# Altium PCB PCB1.PcbDoc (part 1 of 2)
Units mm, origin at the board's own origin, x right, y up, seen from the top; angles counter-clockwise.
Board outline 135 x 78 mm, 2 copper layers (Top Layer, Bottom Layer); 157 components, 80 nets, 337 pads, 19 vias.
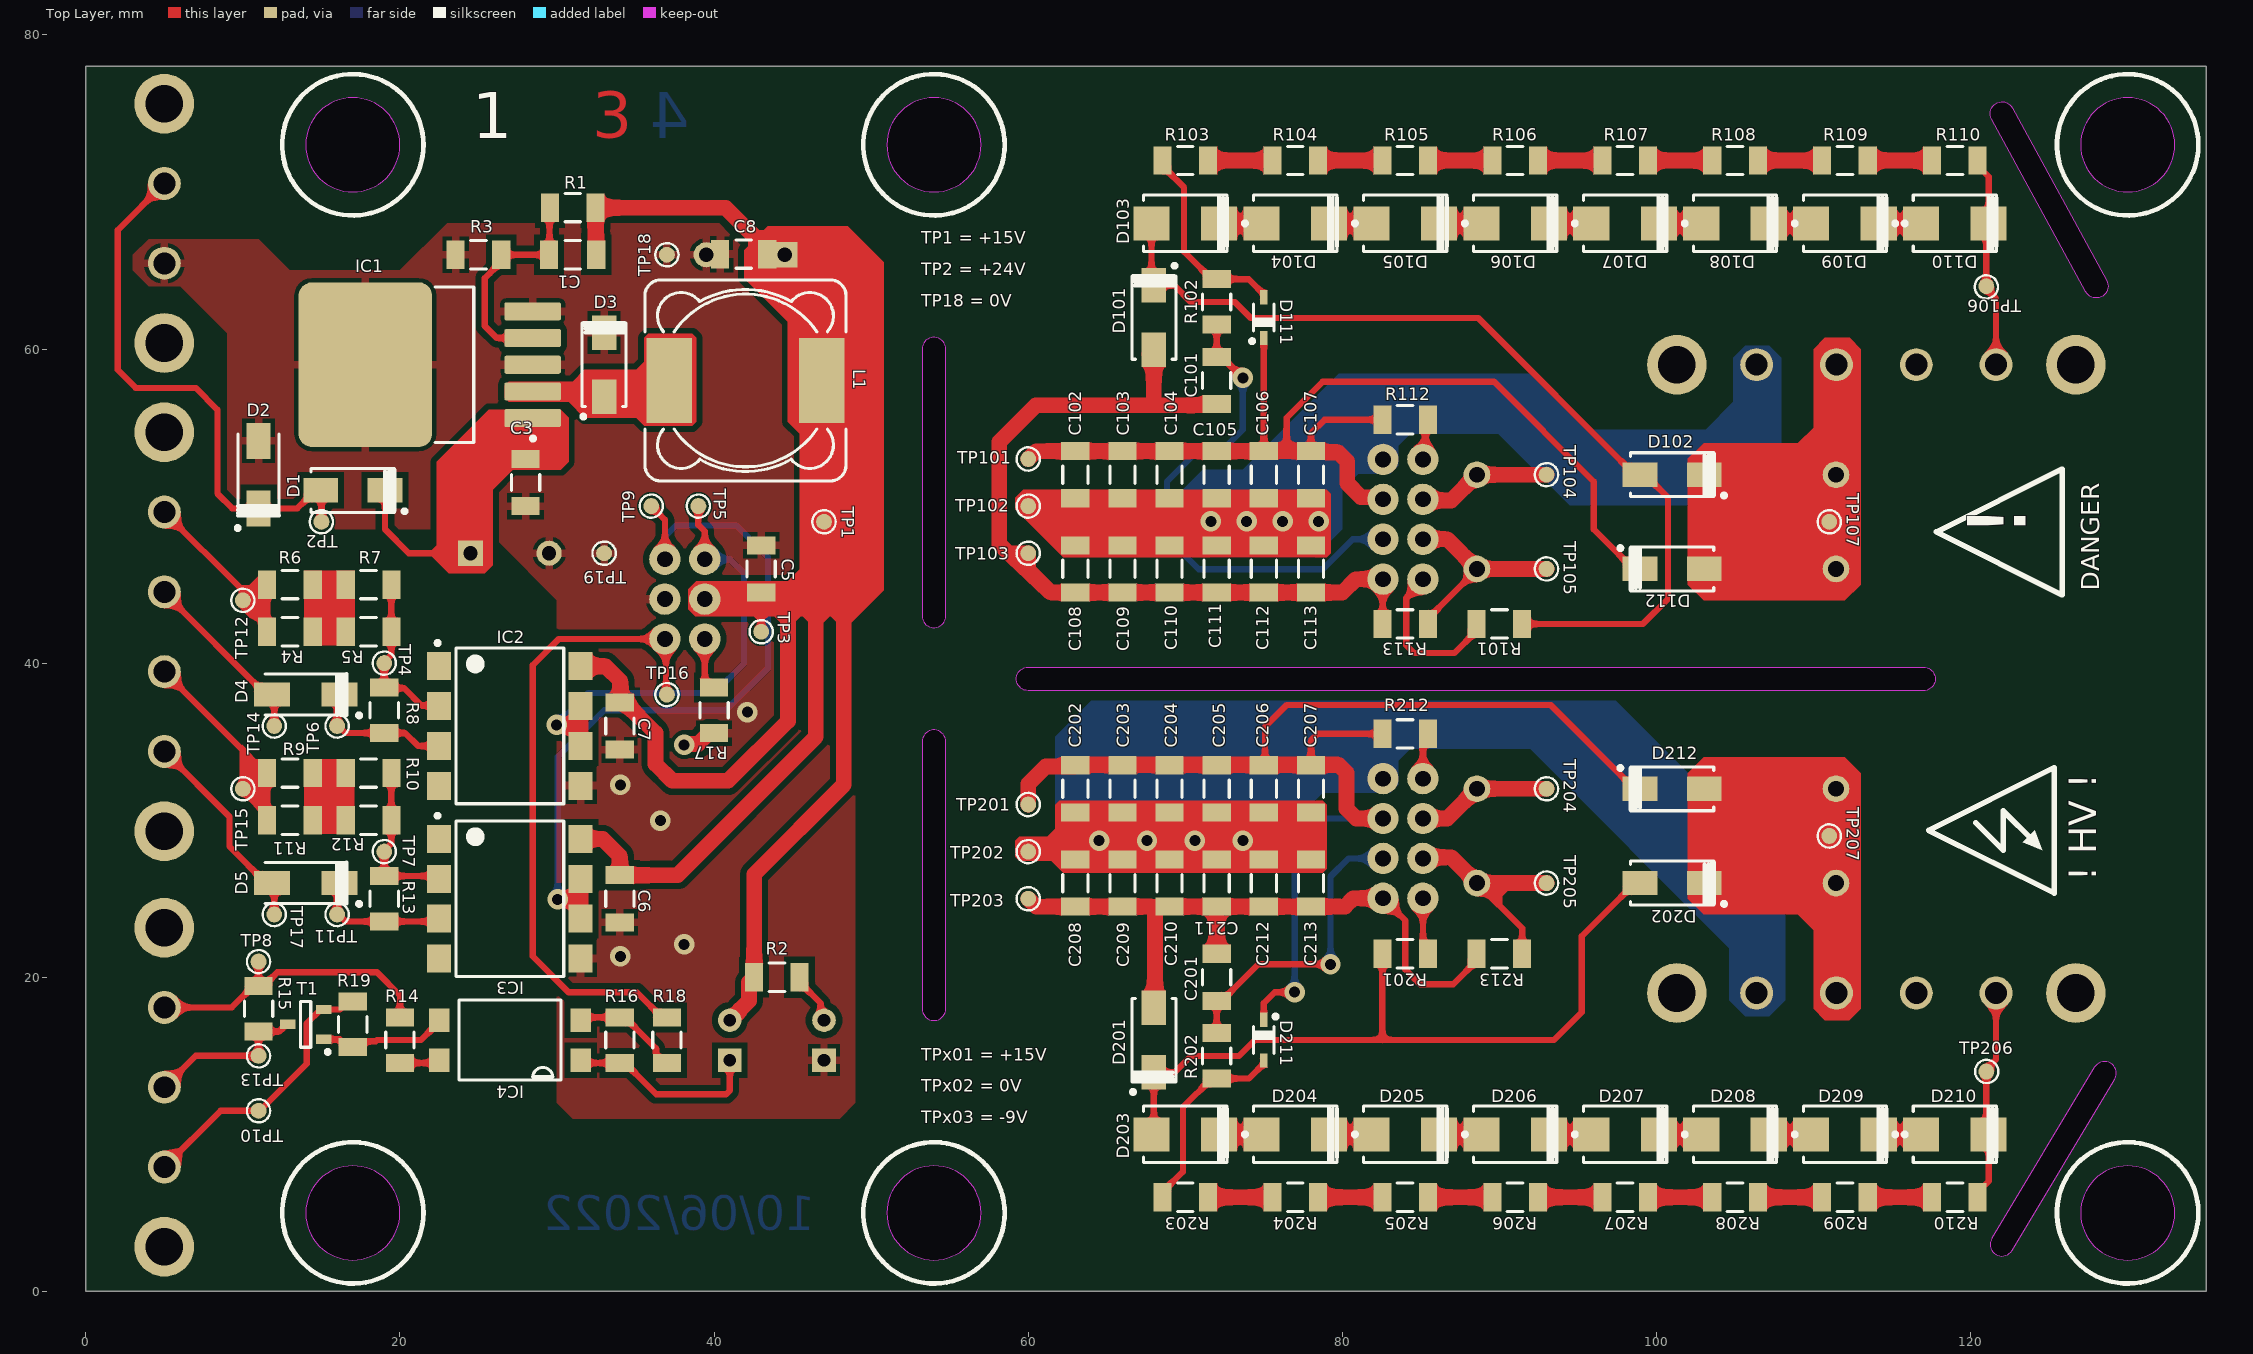
[diagram p0: Top Layer view]
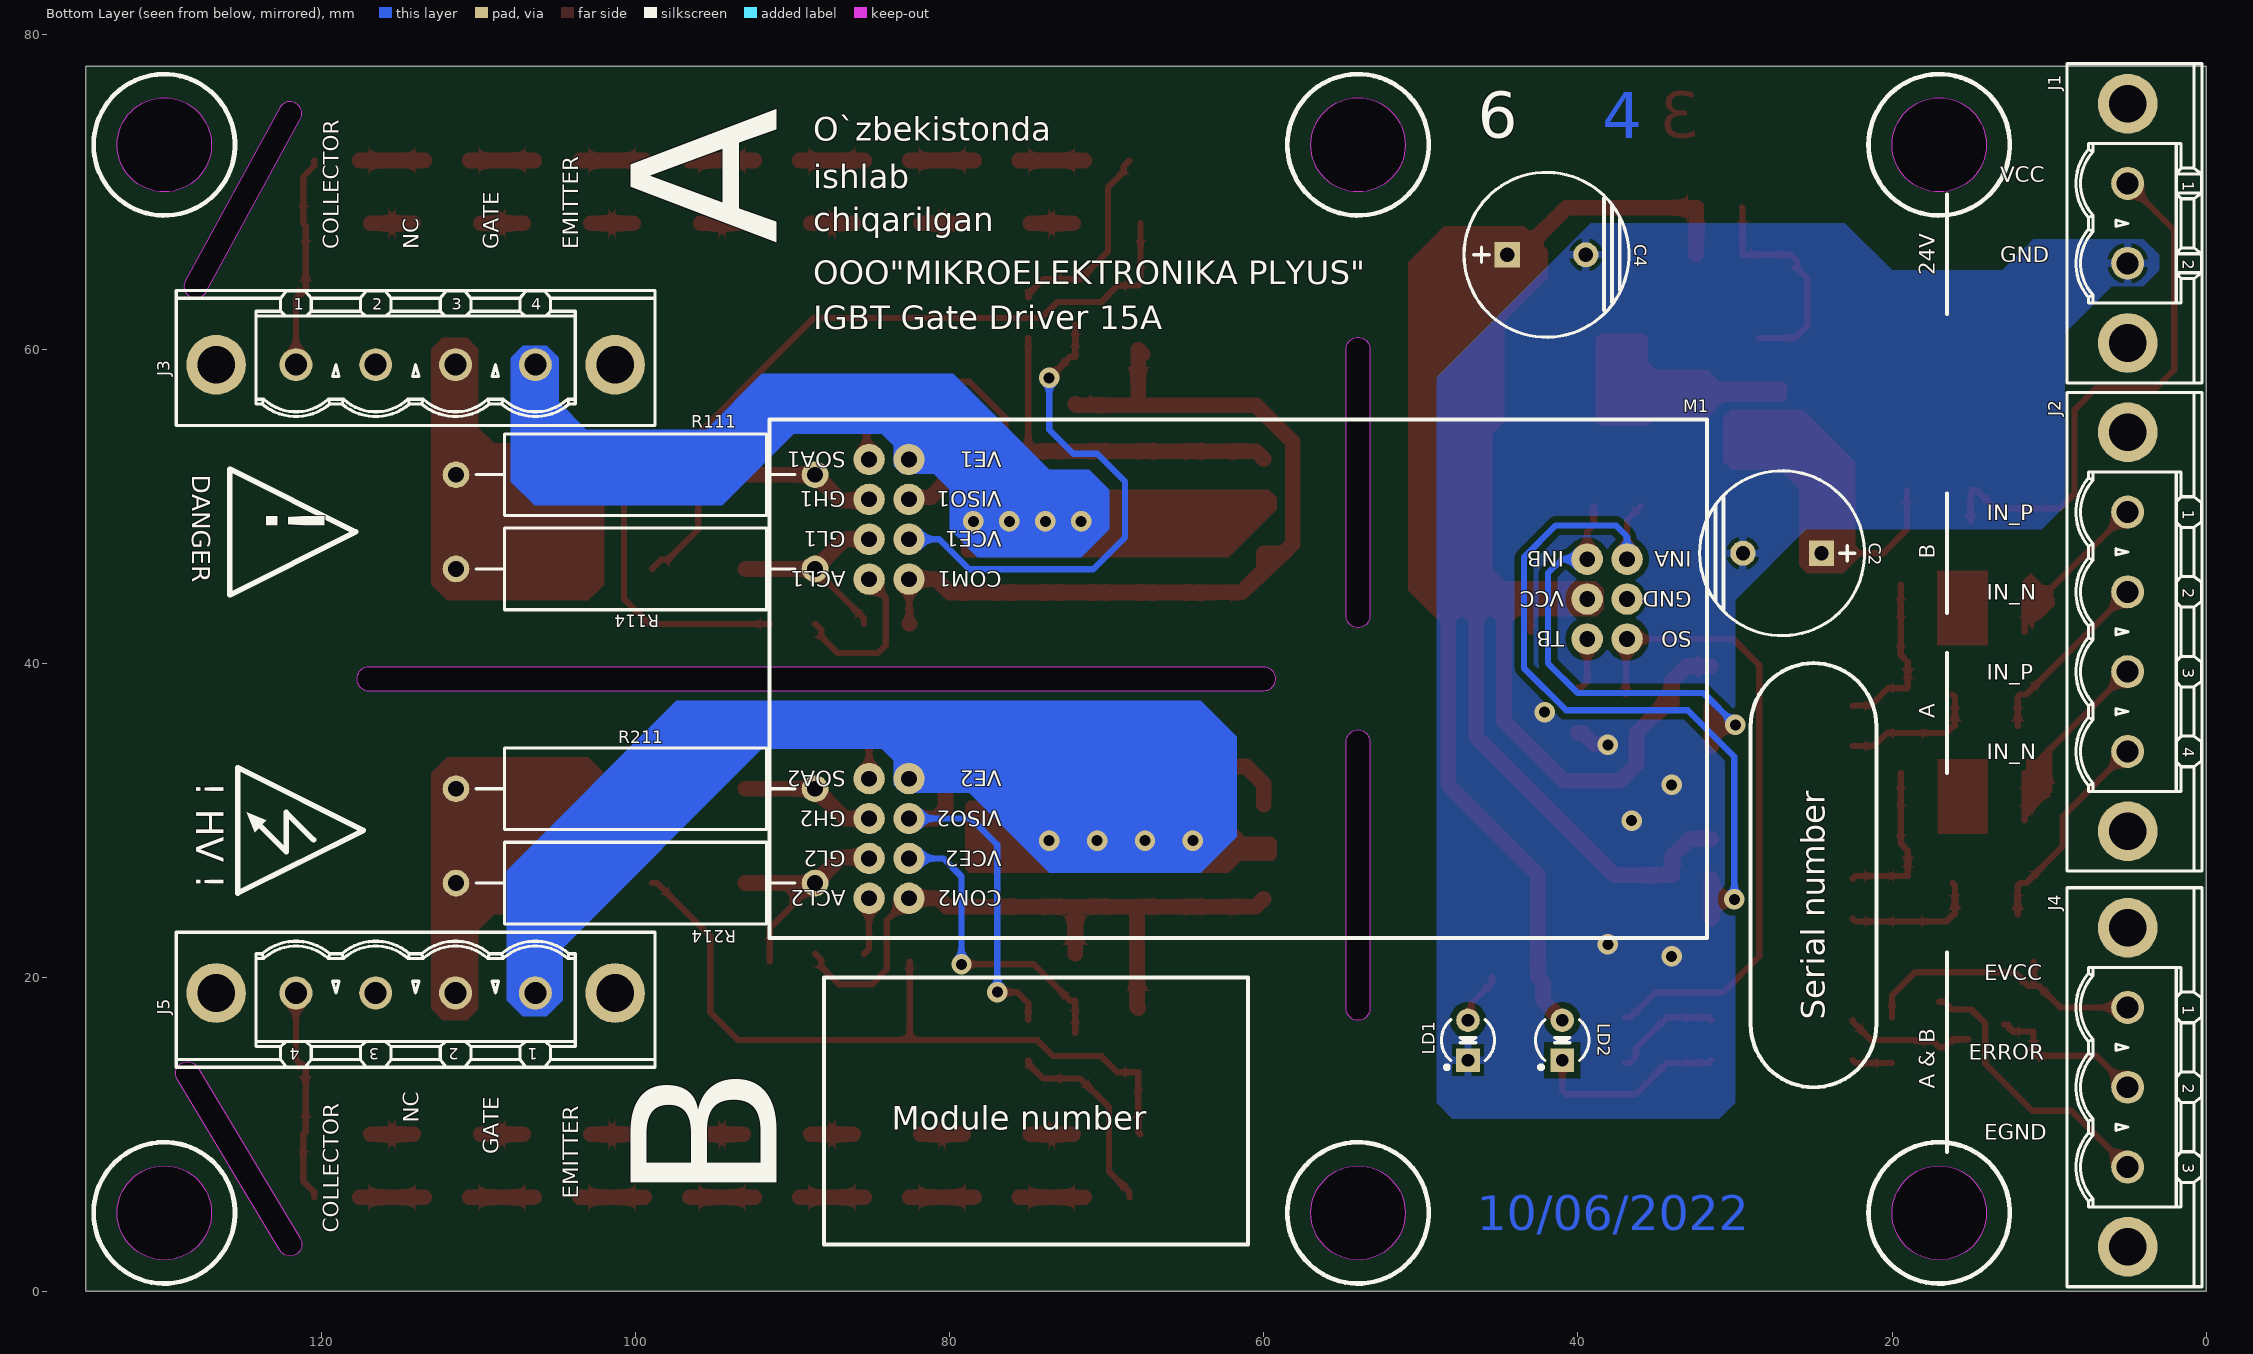
[diagram p1: Bottom Layer view, seen from below]
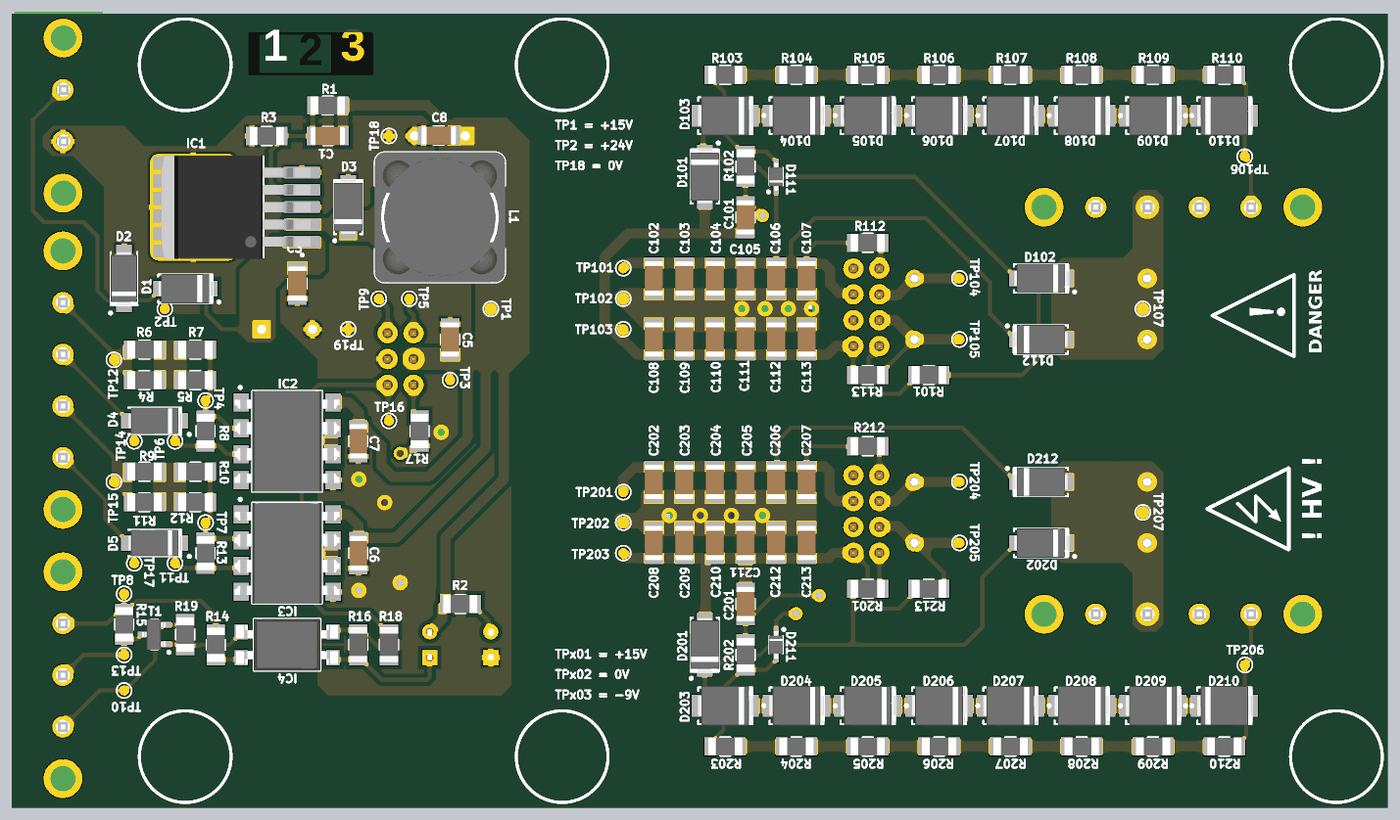
[diagram p3: 3D render of the assembled board from above, using the file's embedded part models]
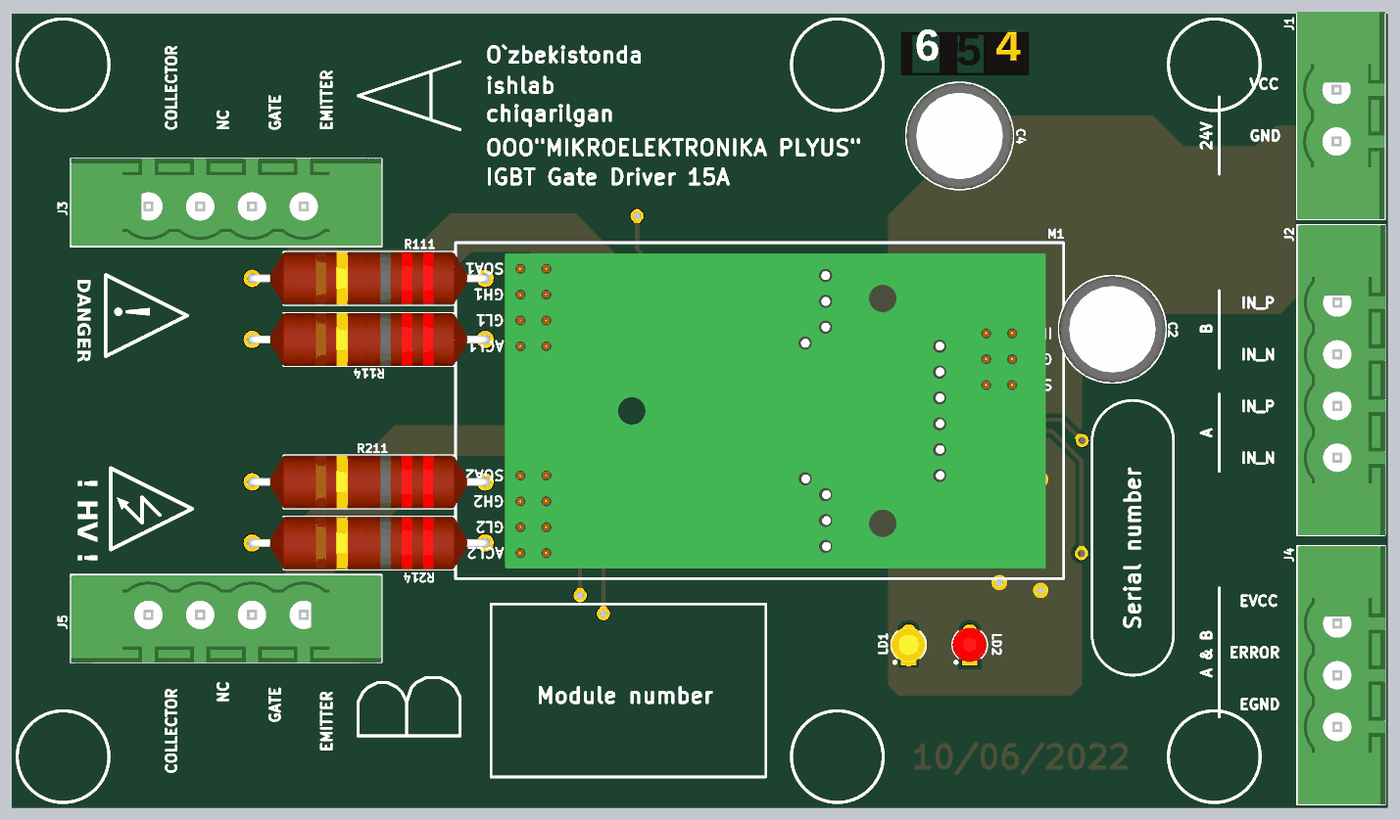
[diagram p4: 3D render of the assembled board from below, using the file's embedded part models]

## Layer stack, top to bottom
Top Solder: solder mask 0.0102, Solder Resist, Dk 3.5
Top Layer: signal copper 0.0356
Dielectric 1: dielectric 0.32, FR-4, Dk 4.8
Bottom Layer: signal copper 0.0356
Bottom Solder: solder mask 0.0102, Solder Resist, Dk 3.5

## Board outline
0,0 0,78 135,78 135,0
cut-out: 121.357,3.386 ccw(c122,3) 122.643,2.614 129.173,13.496 ccw(c128.529,13.882) 129.28,13.882 ccw(c128.529,13.882) 127.886,14.268
cut-out: 127.341,63.641 121.341,74.641 cw(c122,75) 122.659,75.359 128.659,64.359 cw(c128,64) 128.75,64 cw(c128,64)
cut-out: 51,73 ccw(c54,73) 54,70 ccw(c54,73) 57,73 ccw(c54,73) 54,76 ccw(c54,73)
cut-out: 51,5 ccw(c54,5) 54,2 ccw(c54,5) 57,5 ccw(c54,5) 54,8 ccw(c54,5)
cut-out: 53.25,43 ccw(c54,43) 54.75,43 54.75,60 ccw(c54,60) 53.25,60
cut-out: 53.25,18 ccw(c54,18) 54.75,18 54.75,35 ccw(c54,35) 53.25,35
cut-out: 60,38.25 cw(c60,39) 60,39.75 117,39.75 cw(c117,39) 117.75,39 cw(c117,39) 117,38.25
cut-out: 127,5 ccw(c130,5) 130,2 ccw(c130,5) 133,5 ccw(c130,5) 130,8 ccw(c130,5)
cut-out: 127,73 ccw(c130,73) 130,70 ccw(c130,73) 133,73 ccw(c130,73) 130,76 ccw(c130,73)
cut-out: 14,73 ccw(c17,73) 17,70 ccw(c17,73) 20,73 ccw(c17,73) 17,76 ccw(c17,73)
cut-out: 14,5 ccw(c17,5) 17,2 ccw(c17,5) 20,5 ccw(c17,5) 17,8 ccw(c17,5)

## Design rules (kind name [scope] priority, off if disabled: settings)
BoardOutlineClearance [All] p1: gap=0.2 ignorepadtopadclearanceinfootprint=FALSE except(0.4: Arc-SplitBarrior Arc-SplitContinuation Track-SplitBarrior Track-SplitContinuation SMDPad-SplitBarrior SMDPad-SplitContinuation THPad-SplitBarrior THPad-SplitContinuation Via-SplitBarrior Via-SplitContinuation Fill-SplitBarrior Fill-SplitContinuation Poly-SplitBarrior Poly-SplitContinuation Region-SplitBarrior Region-SplitContinuation Text-SplitBarrior Text-SplitContinuation)
Clearance "Clearance Bottom Layer" [OnLayer('Bottom Layer')] p1: gap=0.4 ignorepadtopadclearanceinfootprint=TRUE except(0.203: Arc-Arc Arc-Track Arc-SMDPad Arc-THPad Arc-Via Arc-Hole Track-Track Track-SMDPad Track-THPad Track-Via Track-Hole SMDPad-SMDPad SMDPad-THPad SMDPad-Via SMDPad-Hole THPad-THPad THPad-Via THPad-Hole Via-Via Via-Hole Fill-Hole Poly-Hole Region-Hole Text-Hole; 0.254: Arc-Text Track-Text SMDPad-Text THPad-Text Via-Text Fill-Text Poly-Text Region-Text Text-Text)
Clearance "Clearance Top Layer" [OnLayer('Top Layer')] p2: gap=0.4 ignorepadtopadclearanceinfootprint=TRUE except(0.203: Arc-Arc Arc-Track Arc-SMDPad Arc-THPad Arc-Via Arc-Hole Track-Track Track-SMDPad Track-THPad Track-Via Track-Hole SMDPad-SMDPad SMDPad-THPad SMDPad-Via SMDPad-Hole THPad-THPad THPad-Via THPad-Hole Via-Via Via-Hole Fill-Hole Poly-Hole Region-Hole Text-Hole; 0.254: Arc-Text Track-Text SMDPad-Text THPad-Text Via-Text Fill-Text Poly-Text Region-Text Text-Text)
Clearance [All] p3: gap=0.2 ignorepadtopadclearanceinfootprint=FALSE except(0.089: Arc-Arc Arc-Track Arc-SMDPad Track-Track Track-SMDPad SMDPad-SMDPad; 0.127: Arc-Via Track-Via SMDPad-Via THPad-Via Via-Via; 0.254: Arc-Text Track-Text SMDPad-Text THPad-Text Via-Text Fill-Text Poly-Text Region-Text Text-Text)
HoleSize [All] p1: absolutevalues=TRUE maxlimit=6.3 minlimit=0.2 maxpercent=80.000 minpercent=20.000
MinimumAnnularRing [All] p1: minimumring=0.076
MinimumSolderMaskSliver [All] p1: minsoldermaskwidth=0.1
PolygonConnect PolygonConnect_1 [All] p1: thpad.connectstyle=Relief thpad.reliefconductorwidth=0.508 thpad.reliefentries=4 thpad.polygonreliefangle="90 Angle" thpad.airgapwidth=0.254 smdpad.connectstyle=Relief smdpad.reliefconductorwidth=0.508 smdpad.reliefentries=4 smdpad.polygonreliefangle="90 Angle" smdpad.airgapwidth=0.254 via.connectstyle=Direct via.reliefconductorwidth=0.508 via.reliefentries=4 via.polygonreliefangle="90 Angle" via.airgapwidth=0.254
RoutingCorners [All] p1: cornerstyle=Round minsetback=2.54 maxsetback=2.54
RoutingVias [All] p1: holewidth=0.5 width=1 viastyle="Through Hole" minholewidth=0.2 minwidth=0.45 maxholewidth=1 maxwidth=2
SilkToSilkClearance [All] p1: silktosilkclearance=0.1
SilkToSolderMaskClearance [IsPad] p1: minsilkscreentomaskgap=0.1 clearancetoexposedcopper=TRUE
SolderMaskExpansion [All] p1: expansion=0.102 istentingtop=FALSE
Width [All] p1: maxlimit=2.54 minlimit=0.089 preferedwidth=0.381
25 further rules are at their usual default settings.

## Components (designator, comment, footprint, x,y, rotation, side; value= is the part's Value field where it differs from the comment)
C1 "100nF" CAPC3216X140N 31,66 r180 top
C2 "220uF" CAPPR500-1050X1750 27,47 r0 bottom
C3 "100nF" CAPC3216X140N 28,51.5 r270 top
C4 "220uF" CAPPR500-1050X1750 42,66 r180 bottom
C5 "100nF" CAPC3216X140N 43,46 r90 top
C6 "100nF" CAPC3216X140N 34,25 r270 top
C7 "100nF" CAPC3216X140N 34,36 r270 top
C8 "100nF" CAPC3216X140N 41.886,66.04 r180 top
C101 "27pF" CAPC3216X140N 72,58 r270 top
C102 "10uF" CAPC3216X180N 63,52 r90 top
C103 "10uF" CAPC3216X180N 66,52 r90 top
C104 "10uF" CAPC3216X180N 69,52 r90 top
C105 "10uF" CAPC3216X180N 72,52 r90 top
C106 "10uF" CAPC3216X180N 75,52 r90 top
C107 "10uF" CAPC3216X180N 78,52 r90 top
C108 "10uF" CAPC3216X180N 63,46 r90 top
C109 "10uF" CAPC3216X180N 66,46 r90 top
C110 "10uF" CAPC3216X180N 69,46 r90 top
C111 "10uF" CAPC3216X180N 72,46 r90 top
C112 "10uF" CAPC3216X180N 75,46 r90 top
C113 "10uF" CAPC3216X180N 78,46 r90 top
C201 "27pF" CAPC3216X140N 72,20 r90 top
C202 "10uF" CAPC3216X180N 63,32 r90 top
C203 "10uF" CAPC3216X180N 66,32 r90 top
C204 "10uF" CAPC3216X180N 69,32 r90 top
C205 "10uF" CAPC3216X180N 72,32 r90 top
C206 "10uF" CAPC3216X180N 75,32 r90 top
C207 "10uF" CAPC3216X180N 78,32 r90 top
C208 "10uF" CAPC3216X180N 63,26 r90 top
C209 "10uF" CAPC3216X180N 66,26 r90 top
C210 "10uF" CAPC3216X180N 69,26 r90 top
C211 "10uF" CAPC3216X180N 72,26 r90 top
C212 "10uF" CAPC3216X180N 75,26 r90 top
C213 "10uF" CAPC3216X180N 78,26 r90 top
D1 "SS16" DIOM5127X229N 17,51 r180 top
D2 "SMAJ24A" DIOM5226X262N 11,52 r90 top
D3 "SS16" DIOM5127X229N 33,59 r90 top
D4 "1SMA5918BT3G" DIOM5226X220N 14,38 r180 top
D5 "1SMA5918BT3G" DIOM5226X220N 14,26 r180 top
D101 "SS16" DIOM5127X229N 68,62 r270 top
D102 "SS16" DIOM5127X229N 101,52 r180 top
D103 "SMBJ150A" DIOM5336X265N 70,68 r180 top
D104 "SMBJ150A" DIOM5336X265N 77,68 r180 top
D105 "SMBJ150A" DIOM5336X265N 84,68 r180 top
D106 "SMBJ150A" DIOM5336X265N 91,68 r180 top
D107 "SMBJ150A" DIOM5336X265N 98,68 r180 top
D108 "SMBJ150A" DIOM5336X265N 105,68 r180 top
D109 "SMBJ150A" DIOM5336X265N 112,68 r180 top
D110 "SMBJ150CA" DIOM5336X265N 119,68 r0 top
D111 "BAS416" SOD2512X110N 75,62 r90 top
D112 "SS16" DIOM5127X229N 101,46 r0 top
D201 "SS16" DIOM5127X229N 68,16 r90 top
D202 "SS16" DIOM5127X229N 101,26 r180 top
D203 "SMBJ150A" DIOM5336X265N 70,10 r180 top
D204 "SMBJ150A" DIOM5336X265N 77,10 r180 top
D205 "SMBJ150A" DIOM5336X265N 84,10 r180 top
D206 "SMBJ150A" DIOM5336X265N 91,10 r180 top
D207 "SMBJ150A" DIOM5336X265N 98,10 r180 top
D208 "SMBJ150A" DIOM5336X265N 105,10 r180 top
D209 "SMBJ150A" DIOM5336X265N 112,10 r180 top
D210 "SMBJ150CA" DIOM5336X265N 119,10 r0 top
D211 "BAS416" SOD2512X110N 75,16 r270 top
D212 "SS16" DIOM5127X229N 101,32 r0 top
IC1 "LM2596R-ADJ" TO-263-5 22,59 r180 top
IC2 "FOD3182SDV" "FAIRCHILD_8LD MDIP (OPTION S)" 27,36 r0 top
IC3 "FOD3182SDV" "FAIRCHILD_8LD MDIP (OPTION S)" 27,25 r0 top
IC4 "PC817" FAIRCHILD_FOD817DSD 27,16 r180 top
J1 "" PHOENIX_1777073 5,68 r270 bottom
J2 "" PHOENIX_1777099 5,42 r270 bottom
J3 "" PHOENIX_1777099 114,59 r180 bottom
J4 "" PHOENIX_1777086 5,13 r270 bottom
J5 "" PHOENIX_1777099 114,19 r0 bottom
L1 "33uH" IND_BOURNS_PM127SH 42,58 r0 top
LD1 "Yellow" LED_3MM_YELLOW_1C-2A 47,16 r90 bottom
LD2 "Red" LED_3MM_RED_1C-2A 41,16 r90 bottom
M1 "2SC0115T" 2sc0115t 61,39 r0 bottom locked
R1 "20k" RESC3216X65N 31,69 r0 top
R2 "2k" RESC3216X65N 44,20 r0 top
R3 "1k8" RESC3216X65N 25,66 r0 top
R4 "1k" RESC3216X65N 13,42 r0 top
R5 "1k" RESC3216X65N 18,42 r0 top
R6 "1k" RESC3216X65N 13,45 r0 top
R7 "1k" RESC3216X65N 18,45 r0 top
R8 "4k7" RESC3216X65N 19,37 r90 top
R9 "1k" RESC3216X65N 13,33 r0 top
R10 "1k" RESC3216X65N 18,33 r0 top
R11 "1k" RESC3216X65N 13,30 r0 top
R12 "1k" RESC3216X65N 18,30 r0 top
R13 "4k7" RESC3216X65N 19,25 r90 top
R14 "4k7" RESC3216X65N 20,16 r90 top
R15 "4k7" RESC3216X65N 11,18 r90 top
R16 "2k" RESC3216X70N 34,16 r270 top
R17 "150k" RESC3216X65N 40,37 r90 top
R18 "2k" RESC3216X70N 37,16 r270 top
R19 "100k" RESC3216X65N 17,17 r270 top
R101 "20" RESC3216X65N 90,42.5 r0 top
R102 "120k" RESC3216X65N 72,63 r90 top
R103 "150k" RESC3216X65N 70,72 r0 top
R104 "150k" RESC3216X65N 77,72 r0 top
R105 "150k" RESC3216X65N 84,72 r0 top
R106 "150k" RESC3216X65N 91,72 r0 top
R107 "150k" RESC3216X65N 98,72 r0 top
R108 "150k" RESC3216X65N 105,72 r0 top
R109 "150k" RESC3216X65N 112,72 r0 top
R110 "150k" RESC3216X65N 119,72 r0 top
R111 "5R6" RES2286-1670X520 100,52 r0 bottom
R112 "10k" RESC3216X65N 84,55.5 r180 top
R113 "6k8" RESC3216X65N 84,42.5 r180 top
R114 "5R6" RES2286-1670X520 100,46 r0 bottom
R201 "20" RESC3216X65N 84,21.5 r180 top
R202 "120k" RESC3216X65N 72,15 r270 top
R203 "150k" RESC3216X65N 70,6 r0 top
R204 "150k" RESC3216X65N 77,6 r0 top
R205 "150k" RESC3216X65N 84,6 r0 top
R206 "150k" RESC3216X65N 91,6 r0 top
R207 "150k" RESC3216X65N 98,6 r0 top
R208 "150k" RESC3216X65N 105,6 r0 top
R209 "150k" RESC3216X65N 112,6 r0 top
R210 "150k" RESC3216X65N 119,6 r0 top
R211 "5R6" RES2286-1670X520 100,32 r0 bottom
R212 "10k" RESC3216X65N 84,35.5 r180 top
R213 "6k8" RESC3216X65N 90,21.5 r180 top
R214 "5R6" RES2286-1670X520 100,26 r0 bottom
T1 "BC817" SOT95P230X110-3N 14,17 r180 top
TP1 "Test_point" TP_C40#1 47,49 r0 top
TP2 "Test_point" TP_C40#1 15,49 r90 top
TP3 "Test_point" TP_C40#1 43,42 r90 top
TP4 "Test_point" TP_C40#1 19,40 r90 top
TP5 "Test_point" TP_C40#1 39,50 r90 top
TP6 "Test_point" TP_C40#1 16,36 r90 top
TP7 "Test_point" TP_C40#1 19,28 r90 top
TP8 "Test_point" TP_C40#1 11,21 r270 top
TP9 "Test_point" TP_C40#1 36,50 r90 top
TP10 "Test_point" TP_C40#1 11,11.5 r270 top
TP11 "Test_point" TP_C40#1 16,24 r90 top
TP12 "Test_point" TP_C40#1 10,44 r90 top
TP13 "Test_point" TP_C40#1 11,15 r270 top
TP14 "Test_point" TP_C40#1 12,36 r90 top
TP15 "Test_point" TP_C40#1 10,32 r90 top
TP16 "Test_point" TP_C40#1 37,38 r270 top
TP17 "Test_point" TP_C40#1 12,24 r90 top
TP18 "Test_point" TP_C40#1 37,66 r180 top
TP19 "Test_point" TP_C40#1 33,47 r90 top
TP101 "Test_point" TP_C40#1 60,53 r180 top
TP102 "Test_point" TP_C40#1 60,50 r180 top
TP103 "Test_point" TP_C40#1 60,47 r180 top
TP104 "Test_point" TP_C40#1 93,52 r90 top
TP105 "Test_point" TP_C40#1 93,46 r90 top
TP106 "Test_point" TP_C40#2 121.285,64.135 r90 top
TP107 "Test_point" TP_C40#1 111,49 r90 top
TP201 "Test_point" TP_C40#1 60,31 r180 top
TP202 "Test_point" TP_C40#1 60,28 r180 top
TP203 "Test_point" TP_C40#1 60,25 r180 top
TP204 "Test_point" TP_C40#1 93,32 r90 top
TP205 "Test_point" TP_C40#1 93,26 r90 top
TP206 "Test_point" TP_C40#3 121.285,13.97 r180 top
TP207 "Test_point" TP_C40#1 111,29 r90 top

## Footprints (in the part's own frame and the unit in brackets; to place one, negate y for a bottom-side part, rotate by r counter-clockwise, add the part's x,y. Pads: shape width x height; smd on the part's side, far side on the other; paste and mask are expansions set on the pad)
2sc0115t [mm]
  round 2 hole 1: 1(-21.59,-2.54) 2(-24.13,-2.54) 3(-21.59,-5.08) 4(-24.13,-5.08) 5(-21.59,-7.62) 6(-24.13,-7.62) 7(21.59,-13.97) 8(24.13,-13.97) 9(21.59,-11.43) 10(24.13,-11.43) 11(21.59,-8.89) 12(24.13,-8.89) 13(21.59,-6.35) 14(24.13,-6.35) 15(21.59,6.35) 16(24.13,6.35) 17(21.59,8.89) 18(24.13,8.89) 19(21.59,11.43) 20(24.13,11.43) 21(21.59,13.97) 22(24.13,13.97)
  silkscreen extent -29.21,-16.51 30.48,16.51, body extent -27.46,-15.49 25.63,15.52, height 14.38
CAPC3216X140N [mm] "Chip Capacitor, Body 3.2x1.6mm, IPC Medium Density"
  rect 1.15x1.8 smd: 1(-1.5,0) 2(1.5,0)
  silkscreen extent -0.5,-0.9 0.5,0.9, body extent -1.7,-0.9 1.7,0.9, height 1.4
CAPC3216X180N [mm] "Chip Capacitor, Body 3.2x1.6mm, IPC Medium Density"
  rect 1.15x1.8 smd: 1(-1.5,0) 2(1.5,0)
  silkscreen extent -0.55,-0.8 0.55,0.8, body extent -1.7,-0.9 1.7,0.9, height 1.8
CAPPR500-1050X1750 [mm] "Capacitor, Radial, Pin spacing 5.0mm - Body Diameter 10.5mm X Body Height 17.5mm"
  rect 1.6x1.6 hole 0.9: 1(-2.5,0)
  round 1.6 hole 0.9: 2(2.5,0)
  silkscreen extent -5.25,-5.25 5.25,5.25, body extent -5.25,-5.25 5.25,5.25, height 17.5
DIOM5127X229N [mm] "DO-214-AC/SMA Diode, Molded Body; 5.10mm L X 2.67mm W X 2.29mm H, IPC Medium Density"
  rect 2.2x1.55 smd: 1(-2.05,0) 2(2.05,0)
  silkscreen extent -3.43,-1.4 2.65,1.45, body extent -2.67,-1.45 2.68,1.45, height 2.29
DIOM5226X220N [mm] "DO-214-AC/SMA Diode, Molded Body; 5.21mm L X 2.60mm W X 2.20mm H, IPC Medium Density"
  rect 2.3x1.55 smd: 1(-2.15,0) 2(2.15,0)
  silkscreen extent -3.53,-1.3 2.6,1.45, body extent -2.6,-1.3 2.6,1.3, height 2.2
DIOM5226X262N [mm] "DO-214-AC/SMA Diode, Molded Body; 5.21mm L X 2.605mm W X 2.62mm H, IPC Medium Density"
  rect 2.3x1.55 smd: 1(-2.15,0) 2(2.15,0)
  silkscreen extent -3.52,-1.3 2.6,1.45, body extent -2.6,-1.3 2.6,1.31, height 2.62
DIOM5336X265N [mm] "DO-214-AA/SMB Diode, Molded Body; 5.34mm L X 3.625mm W X 2.65mm H, IPC Medium Density"
  rect 2.3x2.15 smd: 1(-2.15,0) 2(2.15,0)
  silkscreen extent -3.93,-1.8 2.65,1.8, body extent -2.7,-1.95 2.7,1.95, height 2.4
"FAIRCHILD_8LD MDIP (OPTION S)" [mm] "DIP Gull Wing Surface Mount, 8-Leads, Body 9.65x6.6mm, Pitch 2.54mm, FAIRCHILD 8LD MDIP"
  rect 1.52x1.78 smd: 1(-4.505,3.81) 2(-4.505,1.27) 3(-4.505,-1.27) 4(-4.505,-3.81) 5(4.505,-3.81) 6(4.505,-1.27) 7(4.505,1.27) 8(4.505,3.81)
  silkscreen extent -4.72,-4.96 3.43,5.41, body extent -5.15,-4.95 5.15,4.96, height 5.08
FAIRCHILD_FOD817DSD [mm] "SOIC, 2.54mm Pitch, 4 Pin, Body 6.5mm W X 4.6mm L X 4.6mm H"
  rect 1.3x1.5 smd: 1(-4.5,1.27) 2(-4.5,-1.27) 3(4.5,-1.27) 4(4.5,1.27)
  silkscreen extent -3.25,-2.55 3.25,2.55, body extent -5.01,-2.55 5.02,2.55, height 4.06
IND_BOURNS_PM127SH [mm] "SMD Inductor Body Width 12.5mm Body Lenght 12.5mm Height 8mm"
  rect 2.9x5.4 smd: 1(-4.85,0) 2(4.85,0)
  silkscreen extent -6.4,-6.4 6.4,6.4, body extent -6.4,-6.4 6.4,6.4, height 8
LED_3MM_RED_1C-2A [mm] "LED, Red, Body Dia. 3.43 mm, Pin spacing 2.54mm"
  rect 1.5x1.5 hole 0.8: 1(-1.27,0)
  round 1.5 hole 0.8: 2(1.27,0)
  silkscreen extent -1.85,-1.7 1.3,1.7, body extent -1.71,-1.71 1.72,1.72, height 9.85
LED_3MM_YELLOW_1C-2A [mm] "LED, Red, Body Dia. 3.43 mm, Pin spacing 2.54mm"
  rect 1.5x1.5 hole 0.8: 1(-1.27,0)
  round 1.5 hole 0.8: 2(1.27,0)
  silkscreen extent -1.85,-1.7 1.3,1.7, body extent -1.71,-1.71 1.72,1.72, height 9.85
PHOENIX_1777073 [mm] "PCB Header, 12A, 320V, Pitch: 5.08mm, 2 Positions, MSTBV Serie"
  round 2.1 hole 1.4: 1(-2.54,0) 2(2.54,0)
  round 3.8 hole 2.4: P1(-7.62,0) P2(7.62,0)
  silkscreen extent -10.16,-3.87 10.16,4.73, body extent -10.16,-3.87 10.16,4.73, height 12
PHOENIX_1777086 [mm] "PCB Header, 12A, 320V, Pitch: 5.08mm, 3 Positions, MSTBV Serie"
  round 2.1 hole 1.4: 1(-5.08,0) 2(0,0) 3(5.08,0)
  round 3.8 hole 2.4: P1(-10.16,0) P2(10.16,0)
  silkscreen extent -12.7,-3.87 12.7,4.73, body extent -12.7,-3.8 12.7,4.8, height 12
PHOENIX_1777099 [mm] "PCB Header, 12A, 320V, Pitch: 5.08mm, 4 Positions, MSTBV Serie"
  round 2.1 hole 1.4: 1(-7.62,0) 2(-2.54,0) 3(2.54,0) 4(7.62,0)
  round 3.8 hole 2.4: P1(-12.7,0) P2(12.7,0)
  silkscreen extent -15.24,-3.87 15.24,4.73, body extent -15.24,-3.8 15.24,4.8, height 12
RES2286-1670X520 [mm] "Resistor, Axial, Pad spacing 22.86 mm - Body Lengh 16.7mm X Body Diameter 5.2mm"
  round 1.7 hole 1: 1(-11.43,0) 2(11.43,0)
  silkscreen extent -10.16,-2.6 10.16,2.6, body extent -11.82,-2.6 11.82,2.6, height 5.2
RESC3216X65N [mm] "Chip Resistor, EIA 1206, Metric 3216, Body 3.2x1.6mm, IPC Medium Density"
  rect 1.15x1.8 smd: 1(-1.45,0) 2(1.45,0)
  silkscreen extent -0.5,-0.9 0.5,0.9, body extent -1.67,-0.87 1.68,0.88, height 0.65
RESC3216X70N [mm] "Chip Resistor, EIA 1206, Metric 3216, Body 3.2x1.6mm, IPC Medium Density"
  rect 1.15x1.8 smd: 1(-1.45,0) 2(1.45,0)
  silkscreen extent -0.5,-0.9 0.5,0.9, body extent -1.7,-0.9 1.7,0.9, height 0.7
SOD2512X110N [mm] "Small Outline Diode (SOD-323), 1.70mm W X 1.25mm L X 1.10mm H body,  IPC Medium Density"
  rect 0.9x0.5 smd: 1(-1.3,0) 2(1.3,0)
  silkscreen extent -1.62,-0.65 0.85,0.87, body extent -1.35,-0.67 1.35,0.68, height 1.1
SOT95P230X110-3N [mm] "SOT23, 3 pin, Pitch 0.95mm - 1.3mm W X 2.9mm L X 1.1mm H, IPC Medium Density"
  rect 1x0.6 smd: 1(-1.15,0.95) 2(-1.15,-0.95) 3(1.15,0)
  silkscreen extent -1.53,-1.45 0.33,1.87, body extent -1.08,-1.5 1.25,1.5, height 1.1
TO-263-5 [mm] "D2-PAK, 6-Pads, Body 8,9x9,9mm (max), IPC Low Density"
  rrect20% 3.6x1.15 smd: 1(-6.45,3.4) 2(-6.45,1.7) 3(-6.45,0) 4(-6.45,-1.7) 5(-6.45,-3.4)
  rrect20% 8.5x10.5 smd paste-5: 3(4.2,0)
  silkscreen extent -6.6,-4.95 -0.25,4.95, body extent -7.31,-5.08 7.33,5.08, height 4.57
TP_C40#1 [mil]
  round 40 smd paste-100: 1(0,0)
  silkscreen extent -29,-29 29,29
TP_C40#2 [mil]
  round 40 smd paste-100: 1(-5.32,11.22)
  silkscreen extent -36,-18 22,40
TP_C40#3 [mil]
  round 40 smd paste-100: 1(11.22,-1.18)
  silkscreen extent -19,-31 39,28

## Part data
C1 C3 C5 C6 C7 C8: library part CC1206_100NF_50V_10%_X7R, "Non-polarised capacitor", Case=1206, Manufacturer=GENERIC, Manufacturer1 ComponentHeight=1.7mm, Manufacturer1 Example="VISHAY VITRAMON", Manufacturer1 Part Number=VJ1206Y104KXAAT, Tolerance=±10%, Voltage=50V, Author="CERN DEM JLC", Component Type=Standard, CreateDate=03.12.2007, HelpURL=\\cern.ch\dfs\Applications\Altium\Datasheets\CC1206_X7R_VISHAY_VJ.pdf, LatestRevisionDate=03.12.2007, Manufacturer Part Number=CC1206_100NF_50V_10%_X7R, Mounted=Yes, Part Description="SMD Multilayer Chip Ceramic Capacitor", Part Number=CC1206_100NF_50V_10%_X7R, Pin Count=2, Sense=No, SMD=Yes, Socket=No, Status=Preferred, TC=X7R
C2 C4: library part CAER_220UF_35V_20%_500-1050X1750_LESR0R084, "Polarised capacitor", Case="LS5 D10.5 x H17.5", Manufacturer="VISHAY BCCOMPONENTS", Manufacturer Part Number="MAL213660221E3 Series 136RVI", Tolerance=±20%, Voltage=35V, Author="CERN DEM JLC", Component Type=Standard, ComponentHeight=17.5mm, CreateDate=03.07.2008, HelpURL=\\cern.ch\dfs\Applications\Altium\Datasheets\CAER-LESR_VISHAY_136RVI.pdf, LatestRevisionDate=16.03.2009, Mounted=Yes, Part Description="Low ESR 0R084  Aluminum Electrolytic Capacitor", Part Number=CAER_220UF_35V_20%_500-1050X1750_LESR0R084, Pin Count=2, Sense=No, SMD=No, Socket=No, Status=Preferred
C101 C201: library part CC1206_27PF_50V_5%_NP0, "Non-polarised capacitor", Case=1206, Manufacturer=GENERIC, Manufacturer1 ComponentHeight=1.7mm, Manufacturer1 Example="VISHAY VITRAMON", Manufacturer1 Part Number=VJ1206A270JXAAT, Tolerance=±5%, Voltage=50V, Author="CERN DEM JLC", Component Type=Standard, CreateDate=03.12.2007, HelpURL=\\cern.ch\dfs\Applications\Altium\Datasheets\CC1206_NP0_VISHAY_VJ.pdf, LatestRevisionDate=03.12.2007, Manufacturer Part Number=CC1206_27PF_50V_5%_NP0, Mounted=Yes, Part Description="SMD Multilayer Chip Ceramic Capacitor", Part Number=CC1206_27PF_50V_5%_NP0, Pin Count=2, Sense=No, SMD=Yes, Socket=No, Status=Preferred, TC=C0G/NP0
C102 C103 C104 C105 C106 C107 C108 C109 C110 C111 C112 C113 C202 C203 C204 C205 C206 C207 C208 C209 C210 C211 C212 C213: library part CC1206_10UF_25V_10%_X7R, "Non-polarised capacitor", Case=1206, Manufacturer=GENERIC, Manufacturer1 ComponentHeight=1.8mm, Manufacturer1 Example=KEMET, Manufacturer1 Part Number=C1206C106K4RACTU, Tolerance=±10%, Voltage=25V, Author="CERN DEM JLC", Component Type=Standard, CreateDate=12.09.2012, HelpURL=\\cern.ch\dfs\Applications\Altium\Datasheets\CC1206_X7R_KEMET.pdf, LatestRevisionDate=12.09.2012, Manufacturer Part Number=CC1206_10UF_25V_10%_X7R, Mounted=Yes, Part Description="SMD Multilayer Chip Ceramic Capacitor", Part Number=CC1206_10UF_25V_10%_X7R, Pin Count=2, Sense=No, SMD=Yes, Socket=No, Status=Preferred, TC=X7R
D1 D3 D101 D102 D112 D201 D202 D212: "Schottky Diode", Case=DO-214AC, Manufacturer="VISHAY GENERAL SEMICONDUCTOR", Power=1A, Voltage=60V, Author="CERN DEM JLC", Bonding=No, Component Type=Standard, ComponentHeight=2.29mm, CreateDate=15.07.2008, Device=SS16, HelpURL=\\cern.ch\dfs\Applications\Altium\Datasheets\SS16.pdf, LatestRevisionDate=23.08.2010, Manufacturer Part Number=SS16, Mounted=Yes, PackageDescription="DO-214-AC Molded Diode, Body 5.1x2.7mm, IPC Medium Density", Part Description="Surface Mount Schottky Barrier Rectifier", Part Number=SS16, Pin Count=2, PressFit=No, Sense=No, SMD=Yes, Socket=No
D2: "Transient Voltage Suppressor Diode (Uni-Directional)", Case=DO-214AC, Manufacturer=BOURNS, Power=400W, Voltage=24V, Author="CERN DEM JLC", Bonding=No, Component Type=Standard, ComponentHeight=2.62mm, CreateDate=27.06.2011, Device=SMAJ24A, HelpURL=\\cern.ch\dfs\Applications\Altium\Datasheets\SMAJ24A.pdf, LatestRevisionDate=27.06.2011, Manufacturer Part Number=SMAJ24A, Mounted=Yes, PackageDescription="DO-214-AC/SMA Diode, Molded Body; 5.21mm L X 2.605mm W X 2.62mm H, IPC Medium Density", Part Description="Surface Mount Uni-directional Transient Voltage Suppressor Diode", Part Number=SMAJ24A, Pin Count=2, PressFit=No, Sense=No, SMD=Yes, Socket=No
D4 D5: "Zener Diode", Case=DO-214AC, Manufacturer="ON SEMICONDUCTOR", Power=1.5W, Voltage=5.1V, Author="CERN DEM JLC", Bonding=No, Component Type=Standard, ComponentHeight=2.20mm, CreateDate=16.02.2012, Device=1SMA5918BT3G, HelpURL=\\cern.ch\dfs\Applications\Altium\Datasheets\1SMA5918BT3G.pdf, LatestRevisionDate=16.02.2012, Manufacturer Part Number=1SMA5918BT3G, Mounted=Yes, PackageDescription="DO-214-AC/SMA Diode, Molded Body; 5.21mm L X 2.60mm W X 2.20mm H, IPC Medium Density", Part Description="Zener Voltage Regulators", Part Number=1SMA5918BT3G, Pin Count=2, PressFit=No, Sense=No, SMD=Yes, Socket=No
D103 D104 D105 D106 D107 D108 D109 D203 D204 D205 D206 D207 D208 D209: "Transient Voltage Suppressor Diode (Uni-Directional)", Case=DO-214AA, Manufacturer="FAIRCHILD SEMICONDUCTOR", Power=600W, Voltage=150V, Author="CERN DEM MR", Bonding=No, Component Type=Standard, ComponentHeight=2.65mm, CreateDate=14.01.2016, Device=SMBJ150A, HelpURL=\\cern.ch\dfs\Applications\Altium\Datasheets\SMBJ.pdf, LatestRevisionDate=14.01.2016, Manufacturer Part Number=SMBJ150A, Mounted=Yes, PackageDescription="DO-214-AA/SMB Diode, Molded Body; 5.34mm L X 3.625mm W X 2.65mm H, IPC Medium Density", Part Description="Uni-Directional Transient Voltage Suppressor Diode", Part Number=SMBJ150A, Pin Count=2, PressFit=No, Sense=No, SMD=Yes, Socket=No
D110 D210: "Transient Voltage Suppressor Diode (Bi-Directional)", Case=DO-214AA, Manufacturer="FAIRCHILD SEMICONDUCTOR", Power=600W, Voltage=150V, Author="CERN DEM BC", Bonding=No, Component Type=Standard, ComponentHeight=2.65mm, CreateDate=24.03.2020, Device=SMBJ150CA, HelpURL=\\cern.ch\dfs\Applications\Altium\Datasheets\SMBJ.pdf, LatestRevisionDate=24.03.2020, Manufacturer Part Number=SMBJ150CA, Mounted=Yes, PackageDescription="DO-214-AA/SMB Diode, Molded Body; 5.34mm L X 3.625mm W X 2.65mm H, IPC Medium Density", Part Description="Bi-Directional Transient Voltage Suppressor Diode", Part Number=SMBJ150CA, Pin Count=2, PressFit=No, Sense=No, SMD=Yes, Socket=No
D111 D211: "Diode", Case=SOD-323, Manufacturer="NXP SEMICONDUCTORS", Power=200mA, Voltage=75V, Author="CERN DEM JLC", Bonding=No, Component Type=Standard, ComponentHeight=1.1mm, CreateDate=01.10.2013, Device=BAS416, HelpURL=\\cern.ch\dfs\Applications\Altium\Datasheets\BAS416.pdf, LatestRevisionDate=01.10.2013, Manufacturer Part Number=BAS416, Mounted=Yes, PackageDescription="Small Outline Diode (SOD-323), 1.70mm W X 1.25mm L X 1.10mm H body,  IPC Medium Density", Part Description="Low-Leakage Diode", Part Number=BAS416, Pin Count=2, PressFit=No, Sense=No, SMD=Yes, Socket=No
IC1: library part LM2596, "40V 3A TO-263-5 DC-DC Converters RoHS", Current - Output=3A, Frequency - Switching=150kHz, Manufacturer="HTC Korea TAEJIN Tech", Package=TO-263-5, Voltage - Input (Max)=40V, Voltage - Input (Min)=-, Voltage - Output (Max)=37V, Voltage - Output (Min/Fixed)=1.2V, Brand Category="International Brands", Category="Power Management ICs/DC-DC Converters", ComponentLink1Description=lcsc.com, ComponentLink1URL=https://lcsc.com/product-detail/DC-DC-Converters_HTC_LM2596R-ADJ_LM2596R-ADJ_C52684.html, ComponentLink2Description=Datasheet, ComponentLink2URL=https://datasheet.lcsc.com/szlcsc/HTC-Korea-TAEJIN-Tech-LM2596R-ADJ_C52684.pdf, Function=Step-Down, Number of Outputs=1, Output Configuration="Positive or Negative", Output Type="Adjustable (Fixed)", Synchronous Rectifier=No, Topology=Buck
IC2 IC3: "Optocoupler", Case="DIP8 SMD", Manufacturer="FAIRCHILD SEMICONDUCTOR", Author="CERN DEM JLC", Bonding=No, Component Type=Standard, ComponentHeight=5.08mm, CreateDate=20.10.2014, Device=FOD3182SDV, HelpURL=\\cern.ch\dfs\Applications\Altium\Datasheets\FOD3182SDV.pdf, LatestRevisionDate=20.10.2014, Manufacturer Part Number=FOD3182SDV, Mounted=Yes, PackageDescription="DIP Gull Wing Surface Mount, 2.54mm Pitch; 8 Pin, 9.65mm W X 6.60mm L X 5.08mm H body, FAIRCHILD 8LD MDIP", Part Description="3A Output Current, High Speed MOSFET Gate Driver Optocoupler", Part Number=FOD3182SDV, Pin Count=8, PressFit=No, Sense=No, SMD=Yes, Socket=No
IC4: library part FOD817DSD, "Single Optocoupler", Case=SOIC4, Manufacturer="FAIRCHILD SEMICONDUCTOR", Author="CERN DEM JLC", Bonding=No, Component Type=Standard, ComponentHeight=4.6mm, CreateDate=21.07.2014, Device=FOD817DSD, HelpURL=\\cern.ch\dfs\Applications\Altium\Datasheets\FOD817DSD.pdf, LatestRevisionDate=21.07.2014, Manufacturer Part Number=FOD817DSD, Mounted=Yes, PackageDescription="SOIC, 2.54mm Pitch; 4 Pin, 6.50mm W X 4.60mm L X 4.60mm H body", Part Description="4-Pin High Operating Temperature Phototransistor Optocoupler", Part Number=FOD817DSD, Pin Count=4, PressFit=No, Sense=No, SMD=Yes, Socket=No
J1: library part PHOENIX_1777073, "Connector 2 Male", Manufacturer="PHOENIX CONTACT", Manufacturer Part Number="1777073 (MSTBV 2,5/ 2-GF-5,08)", Author="CERN DEM BC", Component Type=Standard, ComponentHeight=12mm, CreateDate=24.08.2015, HelpURL=\\cern.ch\dfs\Applications\Altium\Datasheets\PHOENIX_1777073.pdf, LatestRevisionDate=24.08.2015, Mounted=Yes, Part Description="12A, 320V, Pitch 5.08mm, 2 Positions Header", Part Number=PHOENIX_1777073, Pin Count=2, PressFit=No, Sense=No, SMD=No, Socket=No, Status=None
J2 J3 J5: library part PHOENIX_1777099, "Connector 4 Male", Manufacturer="PHOENIX CONTACT", Manufacturer Part Number="1777099 (MSTBV 2,5/ 4-GF-5,08)", Author="CERN DEM JMW", Component Type=Standard, ComponentHeight=12mm, CreateDate=20.06.2011, HelpURL=\\cern.ch\dfs\Applications\Altium\Datasheets\PHOENIX_1777099.pdf, LatestRevisionDate=20.06.2011, Mounted=Yes, Part Description="12A, 320V, Pitch 5.08mm, 4 Positions Header", Part Number=PHOENIX_1777099, Pin Count=4, PressFit=No, Sense=No, SMD=No, Socket=No, Status=None
J4: library part PHOENIX_1777086, "Connector 3 Male", Manufacturer="PHOENIX CONTACT", Manufacturer Part Number="1777086 (MSTBV 2,5/ 3-GF-5,08)", Author="CERN DEM JMW", Component Type=Standard, ComponentHeight=12mm, CreateDate=20.06.2011, HelpURL=\\cern.ch\dfs\Applications\Altium\Datasheets\PHOENIX_1777086.pdf, LatestRevisionDate=20.06.2011, Mounted=Yes, Part Description="12A, 320V, Pitch 5.08mm, 3 Positions Header", Part Number=PHOENIX_1777086, Pin Count=3, PressFit=No, Sense=No, SMD=No, Socket=No, Status=None
L1: library part IND_33UH_20%_BOURNS_PM127SH, "Inductor", Manufacturer=BOURNS, Manufacturer Part Number=PM127SH-330M-RC, Power=3.5A, Resistance=0.057R, Tolerance=±20%, Author="CERN DEM JLC", Component Type=Standard, ComponentHeight=8mm, CreateDate=18.11.2009, HelpURL=\\cern.ch\dfs\Applications\Altium\Datasheets\IND_BOURNS_PM127SH.pdf, LatestRevisionDate=18.11.2009, Mounted=Yes, Part Description="Shielded SMD Power Inductor PM127SH Series", Part Number=IND_33UH_20%_BOURNS_PM127SH, Pin Count=2, Sense=No, SMD=Yes, Socket=No, Status=None
LD1: library part LED_AVAGO_HLMP-1719, "LED Yellow 1C 2A", Manufacturer="AVAGO TECHNOLOGIES", Manufacturer Part Number=HLMP-1719, Author="CERN DEM JLC", Bonding=No, Color=Yellow, Component Type=Standard, ComponentHeight=6.35mm(min), CreateDate=12.06.2008, HelpURL=\\cern.ch\dfs\Applications\Altium\Datasheets\LED_AVAGO_HLMP-1719.pdf, LatestRevisionDate=17.03.2010, Mounted=Yes, PackageDescription="LED, Yellow, Body Dia. 3.43 mm, Pin spacing 2.54mm", Part Description="3mm Yellow LED", Part Number=LED_AVAGO_HLMP-1719, Pin Count=2, PressFit=No, Sense=No, SMD=No, Socket=No
LD2: library part LED_AVAGO_HLMP-1700, "LED Red 1C 2A", Manufacturer="AVAGO TECHNOLOGIES", Manufacturer Part Number=HLMP-1700, Author="CERN DEM JLC", Bonding=No, Color=Red, Component Type=Standard, ComponentHeight=6.35mm(min), CreateDate=12.06.2008, HelpURL=\\cern.ch\dfs\Applications\Altium\Datasheets\LED_AVAGO_HLMP-1700.pdf, LatestRevisionDate=17.03.2010, Mounted=Yes, PackageDescription="LED, Red, Body Dia. 3.43 mm, Pin spacing 2.54mm", Part Description="3mm Red LED", Part Number=LED_AVAGO_HLMP-1700, Pin Count=2, PressFit=No, Sense=No, SMD=No, Socket=No
R1: library part R1206_20K_1%_0.25W_100PPM, "Resistor - 1%", Case=1206, Manufacturer=GENERIC, Manufacturer1 ComponentHeight=0.65mm, Manufacturer1 Example="NIC COMPONENT", Manufacturer1 Part Number=NRC12F2002TRF, Power=0.25W, Tolerance=±1%, Author="CERN DEM JLC", Component Type=Standard, CreateDate=03.12.2007, HelpURL=\\cern.ch\dfs\Applications\Altium\Datasheets\R1206_NIC_NRC.pdf, LatestRevisionDate=13.03.2008, Manufacturer Part Number=R1206_20K_1%_0.25W_100PPM, Mounted=Yes, Part Description="General Purpose Thick Film Chip Resistor", Part Number=R1206_20K_1%_0.25W_100PPM, Pin Count=2, PressFit=No, Sense=No, SMD=Yes, Socket=No, Status=Preferred, TC=±100ppm/°C
R2: library part R1206_2K_1%_0.25W_100PPM, "Resistor - 1%", Case=1206, Manufacturer=GENERIC, Manufacturer1 ComponentHeight=0.65mm, Manufacturer1 Example="NIC COMPONENT", Manufacturer1 Part Number=NRC12F2001TRF, Power=0.25W, Tolerance=±1%, Author="CERN DEM JLC", Component Type=Standard, CreateDate=03.12.2007, HelpURL=\\cern.ch\dfs\Applications\Altium\Datasheets\R1206_NIC_NRC.pdf, LatestRevisionDate=13.03.2008, Manufacturer Part Number=R1206_2K_1%_0.25W_100PPM, Mounted=Yes, Part Description="General Purpose Thick Film Chip Resistor", Part Number=R1206_2K_1%_0.25W_100PPM, Pin Count=2, PressFit=No, Sense=No, SMD=Yes, Socket=No, Status=Preferred, TC=±100ppm/°C
R3: library part R1206_1K8_1%_0.25W_100PPM, "Resistor - 1%", Case=1206, Manufacturer=GENERIC, Manufacturer1 ComponentHeight=0.65mm, Manufacturer1 Example="NIC COMPONENT", Manufacturer1 Part Number=NRC12F1801TRF, Power=0.25W, Tolerance=±1%, Author="CERN DEM JLC", Component Type=Standard, CreateDate=03.12.2007, HelpURL=\\cern.ch\dfs\Applications\Altium\Datasheets\R1206_NIC_NRC.pdf, LatestRevisionDate=13.03.2008, Manufacturer Part Number=R1206_1K8_1%_0.25W_100PPM, Mounted=Yes, Part Description="General Purpose Thick Film Chip Resistor", Part Number=R1206_1K8_1%_0.25W_100PPM, Pin Count=2, PressFit=No, Sense=No, SMD=Yes, Socket=No, Status=Preferred, TC=±100ppm/°C
R4 R5 R6 R7 R9 R10 R11 R12: library part R1206_1K_1%_0.25W_100PPM, "Resistor - 1%", Case=1206, Manufacturer=GENERIC, Manufacturer1 ComponentHeight=0.65mm, Manufacturer1 Example="NIC COMPONENT", Manufacturer1 Part Number=NRC12F1001TRF, Power=0.25W, Tolerance=±1%, Author="CERN DEM JLC", Component Type=Standard, CreateDate=03.12.2007, HelpURL=\\cern.ch\dfs\Applications\Altium\Datasheets\R1206_NIC_NRC.pdf, LatestRevisionDate=13.03.2008, Manufacturer Part Number=R1206_1K_1%_0.25W_100PPM, Mounted=Yes, Part Description="General Purpose Thick Film Chip Resistor", Part Number=R1206_1K_1%_0.25W_100PPM, Pin Count=2, PressFit=No, Sense=No, SMD=Yes, Socket=No, Status=Preferred, TC=±100ppm/°C
R8 R13 R14 R15: library part R1206_4K7_1%_0.25W_100PPM, "Resistor - 1%", Case=1206, Manufacturer=GENERIC, Manufacturer1 ComponentHeight=0.65mm, Manufacturer1 Example="NIC COMPONENT", Manufacturer1 Part Number=NRC12F4701TRF, Power=0.25W, Tolerance=±1%, Author="CERN DEM JLC", Component Type=Standard, CreateDate=03.12.2007, HelpURL=\\cern.ch\dfs\Applications\Altium\Datasheets\R1206_NIC_NRC.pdf, LatestRevisionDate=13.03.2008, Manufacturer Part Number=R1206_4K7_1%_0.25W_100PPM, Mounted=Yes, Part Description="General Purpose Thick Film Chip Resistor", Part Number=R1206_4K7_1%_0.25W_100PPM, Pin Count=2, PressFit=No, Sense=No, SMD=Yes, Socket=No, Status=Preferred, TC=±100ppm/°C
R16 R18: library part R1206_2K_1%_0.33W_200PPM_KOA_SG73S2BTTD2001F, "Resistor - 1%", Case=1206, Manufacturer=KOA, Manufacturer Part Number=SG73S2BTTD2001F, Power=0.33W, Tolerance=±1%, Author="CERN DEM JMW", Component Type=Standard, ComponentHeight=0.7mm, CreateDate=20.08.2009, HelpURL=\\cern.ch\dfs\Applications\Altium\Datasheets\R1206_KOA_SG73.pdf, LatestRevisionDate=20.08.2009, Mounted=Yes, Part Description="Surge Current Thick Film Chip Resistor", Part Number=R1206_2K_1%_0.33W_200PPM_KOA_SG73S2BTTD2001F, Pin Count=2, PressFit=No, Sense=No, SMD=Yes, Socket=No, Status="Not Recommended", TC=±200ppm/°C
R17 R103 R104 R105 R106 R107 R108 R109 R110 R203 R204 R205 R206 R207 R208 R209 R210: library part R1206_150K_1%_0.25W_100PPM, "Resistor - 1%", Case=1206, Manufacturer=GENERIC, Manufacturer1 ComponentHeight=0.65mm, Manufacturer1 Example="NIC COMPONENT", Manufacturer1 Part Number=NRC12F1503TRF, Power=0.25W, Tolerance=±1%, Author="CERN DEM JLC", Component Type=Standard, CreateDate=03.12.2007, HelpURL=\\cern.ch\dfs\Applications\Altium\Datasheets\R1206_NIC_NRC.pdf, LatestRevisionDate=13.03.2008, Manufacturer Part Number=R1206_150K_1%_0.25W_100PPM, Mounted=Yes, Part Description="General Purpose Thick Film Chip Resistor", Part Number=R1206_150K_1%_0.25W_100PPM, Pin Count=2, PressFit=No, Sense=No, SMD=Yes, Socket=No, Status=Preferred, TC=±100ppm/°C
R19: library part R1206_100K_1%_0.25W_100PPM, "Resistor - 1%", Case=1206, Manufacturer=GENERIC, Manufacturer1 ComponentHeight=0.65mm, Manufacturer1 Example="NIC COMPONENT", Manufacturer1 Part Number=NRC12F1003TRF, Power=0.25W, Tolerance=±1%, Author="CERN DEM JLC", Component Type=Standard, CreateDate=03.12.2007, HelpURL=\\cern.ch\dfs\Applications\Altium\Datasheets\R1206_NIC_NRC.pdf, LatestRevisionDate=13.03.2008, Manufacturer Part Number=R1206_100K_1%_0.25W_100PPM, Mounted=Yes, Part Description="General Purpose Thick Film Chip Resistor", Part Number=R1206_100K_1%_0.25W_100PPM, Pin Count=2, PressFit=No, Sense=No, SMD=Yes, Socket=No, Status=Preferred, TC=±100ppm/°C
R101 R201: library part R1206_20R_1%_0.25W_100PPM, "Resistor - 1%", Case=1206, Manufacturer=GENERIC, Manufacturer1 ComponentHeight=0.65mm, Manufacturer1 Example="NIC COMPONENT", Manufacturer1 Part Number=NRC12F20R0TRF, Power=0.25W, Tolerance=±1%, Author="CERN DEM JLC", Component Type=Standard, CreateDate=03.12.2007, HelpURL=\\cern.ch\dfs\Applications\Altium\Datasheets\R1206_NIC_NRC.pdf, LatestRevisionDate=13.03.2008, Manufacturer Part Number=R1206_20R_1%_0.25W_100PPM, Mounted=Yes, Part Description="General Purpose Thick Film Chip Resistor", Part Number=R1206_20R_1%_0.25W_100PPM, Pin Count=2, PressFit=No, Sense=No, SMD=Yes, Socket=No, Status=Preferred, TC=±100ppm/°C
R102 R202: library part R1206_120K_1%_0.25W_100PPM, "Resistor - 1%", Case=1206, Manufacturer=GENERIC, Manufacturer1 ComponentHeight=0.65mm, Manufacturer1 Example="NIC COMPONENT", Manufacturer1 Part Number=NRC12F1203TRF, Power=0.25W, Tolerance=±1%, Author="CERN DEM JLC", Component Type=Standard, CreateDate=03.12.2007, HelpURL=\\cern.ch\dfs\Applications\Altium\Datasheets\R1206_NIC_NRC.pdf, LatestRevisionDate=13.03.2008, Manufacturer Part Number=R1206_120K_1%_0.25W_100PPM, Mounted=Yes, Part Description="General Purpose Thick Film Chip Resistor", Part Number=R1206_120K_1%_0.25W_100PPM, Pin Count=2, PressFit=No, Sense=No, SMD=Yes, Socket=No, Status=Preferred, TC=±100ppm/°C
R111 R114 R211 R214: library part RMF_5R6_5%_3W_250PPM_2286-1670X520, "Resistor - 5%", Case="LS22.86 L16.7 x D5.2", Manufacturer=GENERIC, Manufacturer1 ComponentHeight=5.2mm, Manufacturer1 Example="VISHAY BCCOMPONENT", Manufacturer1 Part Number=PR03000205608JAC00, Power=3W, Tolerance=±5%, Author="CERN DEM JLC", Component Type=Standard, ComponentHeight=5.2mm, CreateDate=19.06.2008, HelpURL=\\cern.ch\dfs\Applications\Altium\Datasheets\RMF_VISHAY_PR03.pdf, LatestRevisionDate=01.10.2012, Manufacturer Part Number=RMF_5R6_5%_3W_250PPM_2286-1670X520, Mounted=Yes, Part Description="Leaded Power Metal Film Resistor", Part Number=RMF_5R6_5%_3W_250PPM_2286-1670X520, Pin Count=2, PressFit=No, Sense=No, SMD=No, Socket=No, Status=Preferred, TC=±250ppm/°C
R112 R212: library part R1206_10K_1%_0.25W_100PPM, "Resistor - 1%", Case=1206, Manufacturer=GENERIC, Manufacturer1 ComponentHeight=0.65mm, Manufacturer1 Example="NIC COMPONENT", Manufacturer1 Part Number=NRC12F1002TRF, Power=0.25W, Tolerance=±1%, Author="CERN DEM JLC", Component Type=Standard, CreateDate=03.12.2007, HelpURL=\\cern.ch\dfs\Applications\Altium\Datasheets\R1206_NIC_NRC.pdf, LatestRevisionDate=13.03.2008, Manufacturer Part Number=R1206_10K_1%_0.25W_100PPM, Mounted=Yes, Part Description="General Purpose Thick Film Chip Resistor", Part Number=R1206_10K_1%_0.25W_100PPM, Pin Count=2, PressFit=No, Sense=No, SMD=Yes, Socket=No, Status=Preferred, TC=±100ppm/°C
R113 R213: library part R1206_6K8_1%_0.25W_100PPM, "Resistor - 1%", Case=1206, Manufacturer=GENERIC, Manufacturer1 ComponentHeight=0.65mm, Manufacturer1 Example="NIC COMPONENT", Manufacturer1 Part Number=NRC12F6801TRF, Power=0.25W, Tolerance=±1%, Author="CERN DEM JLC", Component Type=Standard, CreateDate=03.12.2007, HelpURL=\\cern.ch\dfs\Applications\Altium\Datasheets\R1206_NIC_NRC.pdf, LatestRevisionDate=13.03.2008, Manufacturer Part Number=R1206_6K8_1%_0.25W_100PPM, Mounted=Yes, Part Description="General Purpose Thick Film Chip Resistor", Part Number=R1206_6K8_1%_0.25W_100PPM, Pin Count=2, PressFit=No, Sense=No, SMD=Yes, Socket=No, Status=Preferred, TC=±100ppm/°C
T1: "NPN Transistor", Case=SOT23-3, Manufacturer="NXP SEMICONDUCTORS", Author="CERN DEM JLC", Bonding=No, Component Type=Standard, ComponentHeight=1.1mm, CreateDate=12.05.2011, Device=BC817, HelpURL=\\cern.ch\dfs\Applications\Altium\Datasheets\BC817.pdf, LatestRevisionDate=12.05.2011, Manufacturer Part Number=BC817, Mounted=Yes, PackageDescription="SOT23, 0.95mm Pitch; 3 Pin, 1.30mm W X 2.90mm L X 1.10mm H body, IPC Medium Density", Part Description="45V 500mA NPN General-Purpose Transistor", Part Number=BC817, Pin Count=3, PressFit=No, Sense=No, SMD=Yes, Socket=No
TP1 TP2 TP3 TP4 TP5 TP6 TP7 TP8 TP9 TP10 TP11 TP12 TP13 TP14 TP15 TP16 TP17 TP18 TP19 TP101 TP102 TP103 TP104 TP105 TP106 TP107 TP201 TP202 TP203 TP204 TP205 TP206 TP207: library part "Test point", "Test point", LatestRevisionDate=17-Jul-2002, LatestRevisionNote="Re-released for DXP Platform.", PackageReference=AXIAL-0.3, Published=8-Jun-2000, Publisher="Altium Limited"

## Via types
v1: diameter 1.3, hole 0.7, Top Layer to Bottom Layer, 19 vias

## Nets (pads, with @x,y where several pads share a name; then routed paths per layer and width w, separated by ;. In a path a pad name is that pad's centre, name@x,y a point inside that pad or via, vN(x,y) a via of type N, cw(c..) or ccw(c..) an arc to the next point about the centre after c; other vN are vias at no path point)
+15V: C1.1 C4.1 C5.1 C6.1 C7.1 C8.1 IC2.8 IC3.8 L1.2 LD2.2 M1.3 R1.2 R2.1 TP1.1 TP3.1 | length 105.5
  Top Layer w0.4: TP3.1@43,42 C5.1@43,44.5
  Top Layer w1: IC3.8@31.505,28.81 32.912,28.81 34,27.722 C6.1@34,26.5 37.676,26.5 46.482,35.306 46.482,44.45 ; IC2.8@31.505,39.81 33.088,39.81 34.036,38.862 34.036,37.536 C7.1@34,37.5 ; C1.1@32.5,66 32.475,66.025 32.475,68.975 R1.2@32.45,69 40.728,69 43.288,66.44 43.292,66.44 43.386,66.346 43.386,66.095 43.461,66.02 44.48,66.02 C4.1@44.5,66 ; C7.1@34.325,37.5 36.268,35.557 36.268,33.582 37.338,32.512 40.894,32.512 44.704,36.322 44.704,43.942 ; LD2.2@41,17.27 42.23,18.5 42.23,19.68 R2.1@42.55,20 42.55,26.548 48.26,32.258 48.26,44.275
COLLECTOR_A: D110.2 J3.1 R110.2 TP106.1 | length 13.6
  Top Layer w0.4: R110.2@120.45,72 120.45,71.675 121.15,70.975 D110.2@121.15,68 121,67.85 TP106.1@121,64 121,63.833 121.62,63.213 J3.1@121.62,59
COLLECTOR_B: D210.2 J5.4 R210.2 TP206.1 | length 13.6
  Top Layer w0.4: R210.2@120.45,6 120.45,6.325 121.15,7.025 D210.2@121.15,10 121,10.15 TP206.1@121,14 121,14.167 121.62,14.787 J5.4@121.62,19
COM_A: C101.2 C108.1 C109.1 C110.1 C111.1 C112.1 C113.1 D101.2 M1.13 R113.2 TP103.1 | length 54.8
  Top Layer w0.4: R113.2@82.57,42.52 M1.13@82.57,45.33
  Top Layer w1: D101.2@67.725,59.675 D101.2@68,59.95 68,56.497 68.072,56.425 ; C101.2@72,56.5 71.925,56.425 68.072,56.425 ; R113.2@82.55,42.5 R113.2@82.57,42.52 ; M1.13@82.57,45.33 M1.13@82.59,45.35 80.854,45.35 80.004,44.5 C113.1@78,44.5 C112.1@75,44.5 C111.1@72,44.5 C110.1@69,44.5 C109.1@66,44.5 C108.1@63,44.5 62.993,44.507 61.411,44.507 60,45.918 TP103.1@60,47 58.752,47 58.166,47.586 58.166,54.102 60.489,56.425 68.072,56.425
COM_B: C201.2 C208.1 C209.1 C210.1 C211.1 C212.1 C213.1 D201.2 M1.21 R213.2 TP203.1 | length 43.6
  Top Layer w0.4: M1.21@82.59,25.03 84,23.62 84,20.5 84.942,19.558 87.058,19.558 88.175,20.675 88.175,21.125 R213.2@88.55,21.5
  Top Layer w1: TP203.1@60,25 60.004,25 60.504,24.5 C208.1@63,24.5 C209.1@66,24.5 68.072,24.5 ; D201.2@68,18.05 68.072,18.122 68.072,24.5 ; C201.2@72,21.5 C211.1@72,24.5 ; M1.21@82.59,25.03 80.694,25.03 80.164,24.5 C213.1@78,24.5 C212.1@75,24.5 C211.1@72,24.5 ; 68.072,24.5 C210.1@69,24.5 C211.1@72,24.5
EGND: J4.3 R19.1 T1.2 TP10.1 | length 17.9
  Top Layer w0.4: J4.3@5,7.92 8.58,11.5 TP10.1@11,11.5 11.071,11.5 14.064,14.493 14.064,17.064 14.95,17.95 T1.2@15.15,17.95 16.175,17.95 16.675,18.45 R19.1@17,18.45
EMITTER_A: C102.1 C103.1 C104.1 C105.1 C106.1 C107.1 C108.2 C109.2 C110.2 C111.2 C112.2 C113.2 J3.4 M1.7 TP102.1
  other v1: 71.628,49.022 73.914,49.022 76.2,49.022 78.486,49.022
EMITTER_B: C202.1 C203.1 C204.1 C205.1 C206.1 C207.1 C208.2 C209.2 C210.2 C211.2 C212.2 C213.2 J5.1 M1.15 TP202.1
  other v1: 64.516,28.702 67.564,28.702 70.612,28.702 73.66,28.702
ERROR_OUTPUT: J4.2 R15.1 T1.3 TP13.1 | length 10.5
  Top Layer w0.4: J4.2@5,13 7,15 TP13.1@11,15 R15.1@11,16.55 12.316,16.55 12.55,16.784 12.55,16.9 12.65,17 T1.3@12.85,17
EVCC: J4.1 R14.2 R15.2 TP8.1 | length 19.5
  Top Layer w0.4: J4.1@5,18.08 9.305,18.08 10.675,19.45 R15.2@11,19.45 ; TP8.1@11,21 R15.2@11,19.45 ; R14.2@20,17.45 20,18.862 18.542,20.32 12.192,20.32 11.7,19.828 11.7,19.825 11.325,19.45 R15.2@11,19.45
GATE_A: D102.1 D112.2 J3.3 R111.2 R114.2 TP107.1
GATE_B: D202.1 D212.2 J5.2 R211.2 R214.2 TP207.1
GND: C2.2 C3.2 C4.2 C5.2 C6.2 C7.2 C8.2 D2.2 D3.2 IC1.3 IC1.5 IC2.5 IC3.5 J1.2 LD1.1 M1.4 R3.1 R17.1 TP18.1 TP19.1 | length 2.2
  Top Layer w1: v1(38.1,34.798) 38.157,34.855 38.98,34.855 39.675,35.55 R17.1@40,35.55
  other v1: 34.036,21.336 38.1,22.098 36.576,29.972 34.036,32.258 42.122,36.878
IN_A_N: D4.2 J2.2 TP14.1 | length 11.7
  Top Layer w0.4: J2.2@5,44.54 5,44.475 11.475,38 D4.2@11.85,38 12,37.85 TP14.1@12,36
IN_A_P: J2.1 R4.1 R6.1 TP12.1 | length 12.5
  Top Layer w0.4: J2.1@5,49.62 9.927,44.693 9.927,44.073 TP12.1@10,44 10.875,44 R6.1@11.55,44.675 ; R4.1@11.55,42 R6.1@11.55,44.675 ; R6.1@11.55,45 R6.1@11.55,44.675
IN_B_N: D5.2 J2.4 TP17.1 | length 13.5
  Top Layer w0.4: J2.4@5,34.38 9.144,30.236 9.144,28.331 11.475,26 D5.2@11.85,26 12,25.85 TP17.1@12,24
IN_B_P: J2.3 R9.1 R11.1 TP15.1 | length 14.8
  Top Layer w0.4: J2.3@5,39.46 10,34.46 TP15.1@10,32 10,31.875 R11.1@11.55,30.325 ; R11.1@11.55,30 R11.1@11.55,30.325 ; R9.1@11.55,33 R11.1@11.55,30.325
NetC1_2: C1.2 IC1.4 R1.1 R3.2 | length 14.4
  Top Layer w0.4: IC1.4@28.45,60.7 26.168,60.7 25.4,61.468 25.4,64.516 26.075,65.191 26.075,65.625 R3.2@26.45,66 C1.2@29.5,66 29.525,66.025 29.525,68.975 R1.1@29.55,69
NetC2_1: C2.1 C3.1 D1.1 IC1.1 | length 8.6
  Top Layer w0.4: D1.1@19.05,51 19.05,48.514 20.564,47 C2.1@24.5,47
NetC101_1: C101.1 M1.11 R102.1 | length 32.7
  Top Layer w0.4: R102.1@72,61.55 C101.1@72,59.5 72.325,59.5 v1(73.66,58.166)
  Bottom Layer w0.4: v1(73.66,58.166) 73.66,54.864 72.136,53.34 70.612,53.34 68.834,51.562 68.834,48.006 70.866,45.974 78.74,45.974 80.656,47.89 M1.11@82.59,47.89
NetC201_1: C201.1 M1.19 R202.1 | length 19.7
  Top Layer w0.4: R202.1@72,16.45 C201.1@72,18.5 72.325,18.5 74.653,20.828 v1(79.248,20.828)
  Bottom Layer w0.4: v1(79.248,20.828) 79.248,26.416 80.402,27.57 M1.19@82.59,27.57
NetD3_1: D3.1 IC1.2 L1.1
NetD4_1: D4.1 IC2.3 R8.1 TP6.1 | length 9.1
  Top Layer w0.4: D4.1@16.15,38 16,37.85 TP6.1@16,36 16.092,36 16.542,35.55 20.33,35.55 21.15,34.73 IC2.3@22.495,34.73
NetD5_1: D5.1 IC3.3 R13.1 TP11.1 | length 8.8
  Top Layer w0.4: D5.1@16.15,26 16,25.85 TP11.1@16,24 16.092,24 16.542,23.55 22.315,23.55 IC3.3@22.495,23.73
NetD101_1: D101.1 D102.2 D103.2 R101.2 | length 58.7
  Top Layer w0.4: D103.2@67.85,68 67.85,64.2 D101.1@68,64.05 69.3,64.05 70.358,62.992 73.152,62.992 74.168,61.976 88.649,61.976 98.625,52 D102.2@98.95,52 99.275,52 100.74,50.535 100.74,44.098 99.142,42.5 R101.2@91.45,42.5
NetD103_1: D103.1 D104.2 | length 2.7
  Top Layer w1: D103.1@72.15,68 D104.2@74.85,68
NetD104_1: D104.1 D105.2 | length 2.7
  Top Layer w1: D104.1@79.15,68 D105.2@81.85,68
NetD105_1: D105.1 D106.2 | length 2.7
  Top Layer w1: D105.1@86.15,68 D106.2@88.85,68
NetD106_1: D106.1 D107.2 | length 2.7
  Top Layer w1: D106.1@93.15,68 D107.2@95.85,68
NetD107_1: D107.1 D108.2 | length 2.7
  Top Layer w1: D107.1@100.15,68 D108.2@102.85,68
NetD108_1: D108.1 D109.2 | length 2.7
  Top Layer w1: D108.1@107.15,68 D109.2@109.85,68
NetD109_1: D109.1 D110.1 | length 2.7
  Top Layer w1: D109.1@114.15,68 D110.1@116.85,68
NetD111_2: D111.2 R102.2 R103.1 | length 12.8
  Top Layer w0.4: R103.1@68.55,72 68.925,71.625 68.925,71.283 69.925,70.283 69.925,66.2 71.675,64.45 R102.2@72,64.45 74.05,64.45 75,63.5 D111.2@75,63.3
NetD201_1: D201.1 D202.2 D203.2 R201.2 | length 47.8
  Top Layer w0.4: D203.2@67.85,10 68,10.15 D201.1@68,13.95 69.322,13.95 70.358,14.986 73.406,14.986 74.422,16.002 82.55,16.002 ; R201.2@82.55,21 82.55,16.002 ; D202.2@98.95,26 98.625,26 98.05,25.425 95.25,22.625 95.25,17.78 93.472,16.002 82.55,16.002
NetD203_1: D203.1 D204.2 | length 2.7
  Top Layer w1: D203.1@72.15,10 D204.2@74.85,10
NetD204_1: D204.1 D205.2 | length 2.7
  Top Layer w1: D204.1@79.15,10 D205.2@81.85,10
NetD205_1: D205.1 D206.2 | length 2.7
  Top Layer w1: D205.1@86.15,10 D206.2@88.85,10
NetD206_1: D206.1 D207.2 | length 2.7
  Top Layer w1: D206.1@93.15,10 D207.2@95.85,10
NetD207_1: D207.1 D208.2 | length 2.7
  Top Layer w1: D207.1@100.15,10 D208.2@102.85,10
NetD208_1: D208.1 D209.2 | length 2.7
  Top Layer w1: D208.1@107.15,10 D209.2@109.85,10
NetD209_1: D209.1 D210.1 | length 2.7
  Top Layer w1: D209.1@114.15,10 D210.1@116.85,10
NetD211_2: D211.2 R202.2 R203.1 | length 12.8
  Top Layer w0.4: R203.1@68.55,6 68.55,6.325 69.85,7.625 69.85,11.725 71.675,13.55 R202.2@72,13.55 74.05,13.55 75,14.5 D211.2@75,14.7
NetIC2_2: IC2.2 R5.2 R7.2 R8.2 TP4.1 | length 10.7
  Top Layer w0.4: R7.2@19.45,45 R5.2@19.45,42 19.45,40.519 19,40.069 TP4.1@19,40 R8.2@19,38.45 19.042,38.408 20.266,38.408 21.369,37.305 22.46,37.305 IC2.2@22.495,37.27
NetIC2_6: IC2.6 IC2.7 M1.5 TP5.1 | length 29.8
  Top Layer w0.4: TP5.1@39,50 39,48.801 39.41,48.391 M1.5@39.41,46.62
  Top Layer w1: v1(29.972,36.068) 30.024,36.016 31.505,36.016 ; IC2.6@31.505,34.73 31.505,36.016 ; IC2.7@31.505,37.27 31.505,36.016
  Bottom Layer w0.4: v1(29.972,36.068) 32.004,38.1 40.005,38.1 41.91,40.005 41.91,45.72 41.01,46.62 M1.5@39.41,46.62
NetIC3_2: IC3.2 R10.2 R12.2 R13.2 TP7.1 | length 10.3
  Top Layer w0.4: R10.2@19.45,33 R12.2@19.45,30 19.45,28.519 19,28.069 TP7.1@19,28 R13.2@19,26.45 22.315,26.45 IC3.2@22.495,26.27
NetIC3_6: IC3.6 IC3.7 M1.6 TP9.1 | length 48.7
  Top Layer w0.4: TP9.1@36,50 36.87,49.13 M1.6@36.87,46.62
  Top Layer w1: v1(30.042,24.962) 31.505,24.962 ; IC3.6@31.505,23.73 31.505,24.962 ; IC3.7@31.505,26.27 31.505,24.962
  Bottom Layer w0.4: v1(30.042,24.962) 30.042,34.042 33,37 40.754,37 43.434,39.68 43.434,46.736 41.402,48.768 37.592,48.768 36.87,48.046 M1.6@36.87,46.62
NetIC4_1: IC4.1 LD2.1 R16.2 | length 12.4
  Top Layer w0.4: IC4.1@31.5,14.73 31.68,14.55 R16.2@34,14.55 34.325,14.55 36.322,12.553 40.766,12.553 41,12.787 LD2.1@41,14.73
NetIC4_2: IC4.2 R16.1 R18.2 | length 7.1
  Top Layer w0.4: IC4.2@31.5,17.27 31.68,17.45 R16.1@34,17.45 34.325,17.45 36.3,15.475 36.3,14.925 36.675,14.55 R18.2@37,14.55
NetIC4_3: IC4.3 R19.2 T1.1 | length 8.3
  Top Layer w0.4: T1.1@15.15,16.05 16.175,16.05 16.675,15.55 R19.2@17,15.55 17.375,15.925 18.465,15.925 18.542,16.002 21.332,16.002 22.5,17.17 IC4.3@22.5,17.27
NetIC4_4: IC4.4 R14.1 | length 2.6
  Top Layer w0.4: R14.1@20,14.55 22.32,14.55 IC4.4@22.5,14.73
NetLD1_2: LD1.2 R2.2 | length 3.4
  Top Layer w0.4: R2.2@45.45,20 45.45,19.675 46.79,18.335 46.79,17.48 LD1.2@47,17.27
NetM1_1: M1.1 R17.2 | length 3.5
  Top Layer w0.4: M1.1@39.41,41.54 39.41,38.825 39.785,38.45 R17.2@40,38.45